# Altium PCB proj_pankov_control_board.PcbDoc (part 1 of 2)
Units mm, origin at the board's own origin, x right, y up, seen from the top; angles counter-clockwise.
Board outline 150 x 100 mm, 2 copper layers (Top Layer, Bottom Layer), stack 1.536 mm thick; 103 components, 103 nets, 425 pads, 60 vias.
Unrouted connection lines stored in the file: 170.
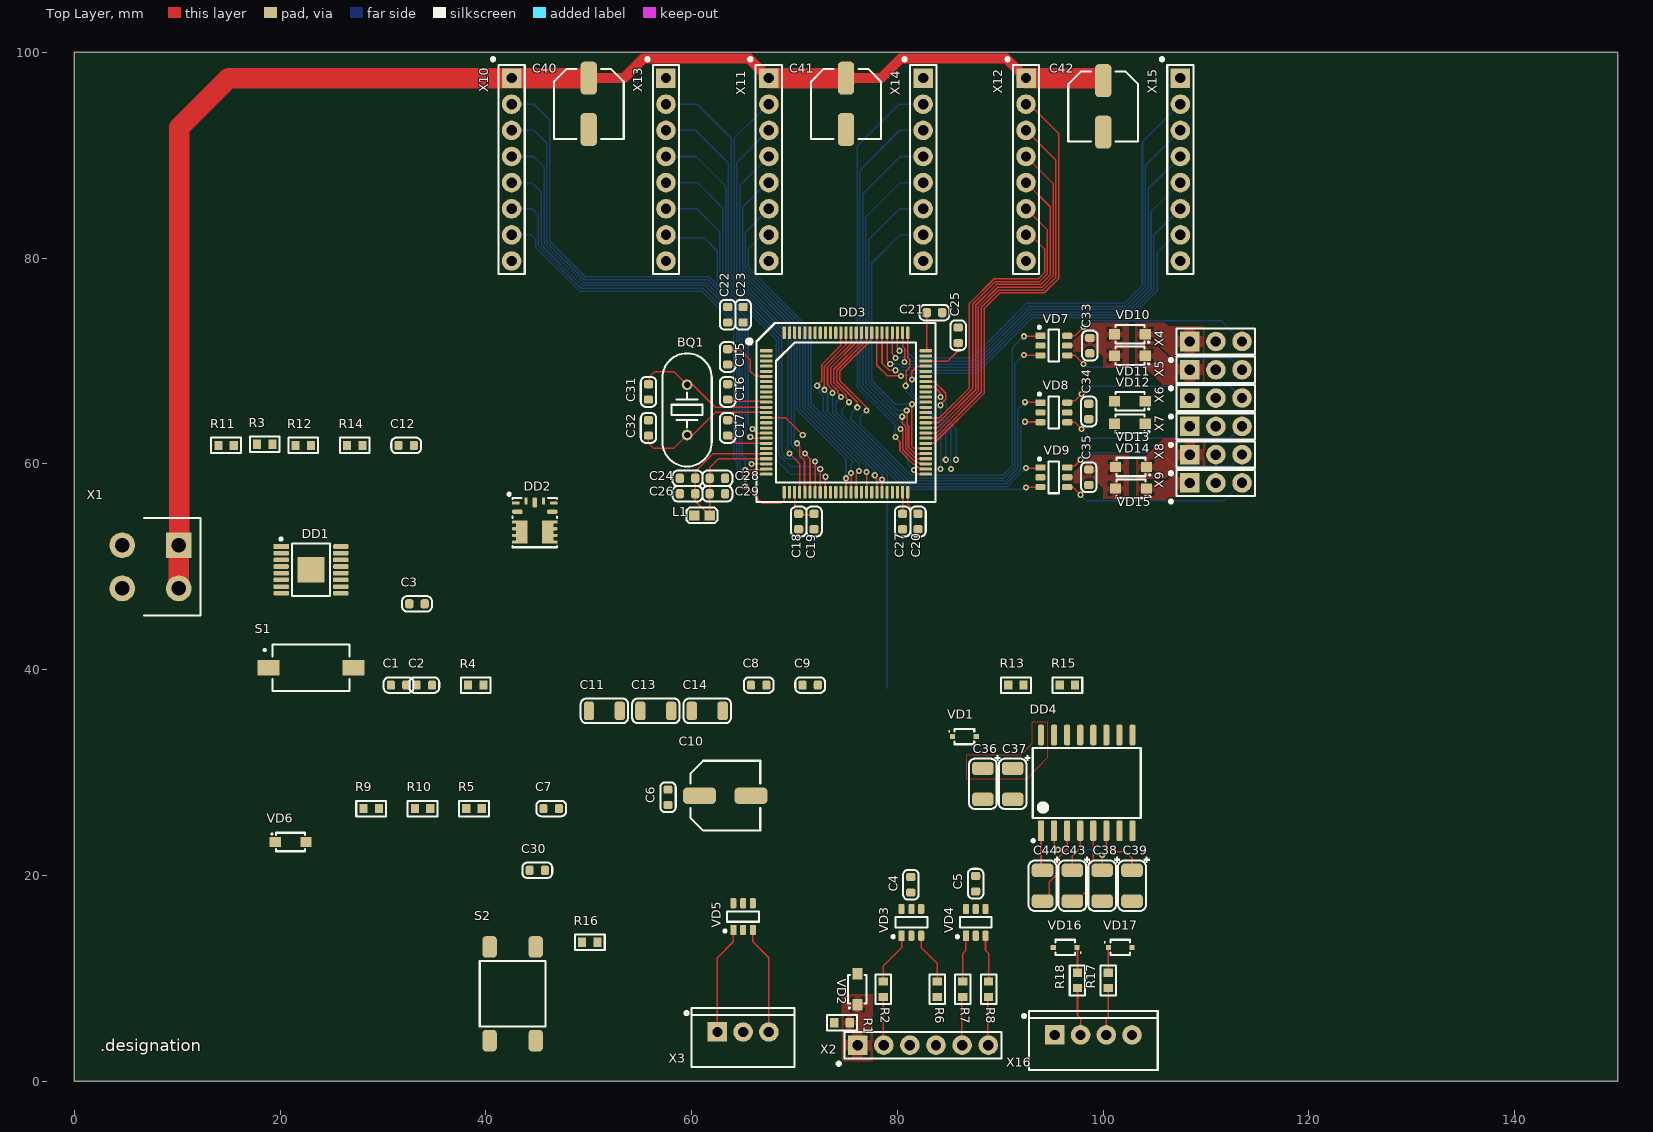
[diagram p0: Top Layer view]
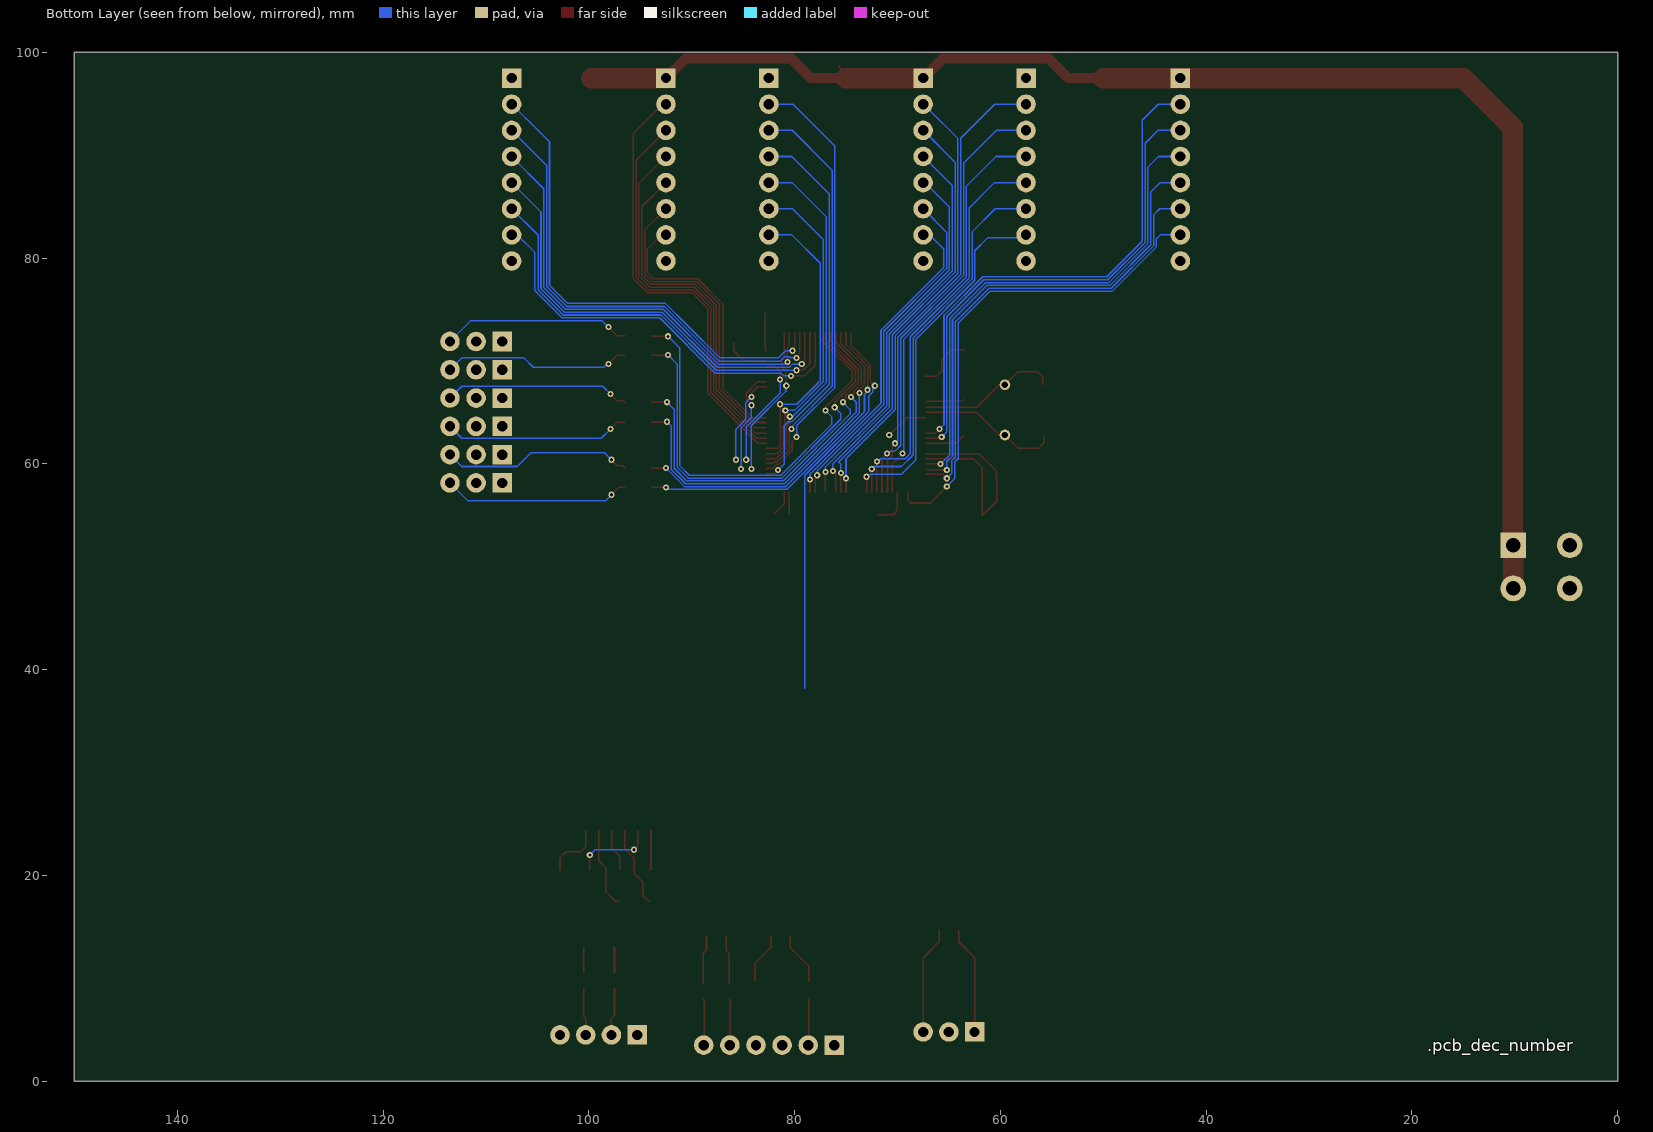
[diagram p1: Bottom Layer view, seen from below]

## Layer stack, top to bottom
Top Solder: solder mask 0.0102, Solder Resist, Dk 3.5
Top Layer: signal copper 0.018
Core 1: core 1.5, FR4, Dk 4.6
Bottom Layer: signal copper 0.018
Bottom Solder: solder mask 0.0102, Solder Resist, Dk 3.5

## Board outline
0,0 150,0 150,100 0,100

## Design rules (kind name [scope] priority, off if disabled: settings)
AcuteAngle min_acute_angle [OnCopper] p1: minimum=3.50000000000000E+0001 checktracksonly=FALSE // Минимальный угол между примитивами топологии
BoardOutlineClearance board_outline_clearance_std [NOT (OnLayer('Bottom Overlay') OR OnLayer('Top Overlay'))] p1: gap=0.25 ignorepadtopadclearanceinfootprint=FALSE except(0: Arc-SplitContinuation Track-SplitContinuation SMDPad-SplitContinuation THPad-SplitContinuation Via-SplitContinuation Fill-SplitContinuation Poly-SplitContinuation Region-SplitContinuation Text-SplitContinuation) // Отступ элементов топологии от края фрезеруемой печатной платы
Clearance clearance_outer_18um_std [OnTopLayer OR OnBottomLayer] p1: gap=0.125 ignorepadtopadclearanceinfootprint=TRUE except(0.2: Arc-Fill Arc-Poly Track-Fill Track-Poly SMDPad-SMDPad SMDPad-Fill SMDPad-Poly THPad-Fill THPad-Poly Via-Fill Via-Poly Fill-Fill Fill-Poly Poly-Poly Poly-Region Poly-Text; 0.25: Arc-Hole Track-Hole SMDPad-Hole THPad-Hole Via-Hole Fill-Hole Poly-Hole Region-Hole Text-Hole) // Зазоры на внешних слоях
Clearance clearance_inner_18um_std [NOT (OnTopLayer Or OnBottomLayer)] p2: gap=0.125 ignorepadtopadclearanceinfootprint=FALSE except(0.2: Arc-Fill Arc-Poly Track-Fill Track-Poly SMDPad-SMDPad SMDPad-Fill SMDPad-Poly THPad-Fill THPad-Poly Via-Fill Via-Poly Fill-Fill Fill-Poly Poly-Poly Poly-Region Poly-Text; 0.25: Arc-Hole Track-Hole SMDPad-Hole THPad-Hole Via-Hole Fill-Hole Poly-Hole Region-Hole Text-Hole) // Зазоры на внутренних слоях
ComponentClearance [All] p1: gap=0 collisioncheckmode=3 verticalgap=0 showdistances=FALSE
DiffPairsRouting diff_pairs_routing [All] p1: maxlimit=0.127 minlimit=0.127 mostfreqgap=0.127 toplayer_minwidth=0.143 toplayer_maxwidth=0.143 toplayer_prefwidth=0.143 bottomlayer_minwidth=0.143 bottomlayer_maxwidth=0.143 bottomlayer_prefwidth=0.143 impedanceprofiledriven=TRUE impedanceprofileid={FD46899E-B5A2-4EF5-A302-5D2DB6A51F35} maxuncoupledlength=12.7 // Правила трассировки дифференциальных пар
HoleSize min_hole_size_std [IsPad] p1: absolutevalues=TRUE maxlimit=5.9 minlimit=0.6 maxpercent=80.000 minpercent=20.000 // Диаметр межслойного переходного отверстия
HoleSize min_hole_size_via_std [IsVia] p2: absolutevalues=TRUE maxlimit=5.9 minlimit=0.3 maxpercent=80.000 minpercent=20.000 // Минимальный диаметр монтажного отверстия
HoleToHoleClearance hole_to_hole_clearance_std [All] p1: gap=0.2 allowstackedmicrovias=FALSE // Минимальное расстояние между краями двух отверстий
MinimumAnnularRing min_via_ar_std [All] p1: minimumring=0.15 // Поясок площадки переходного отверстия (Annular ring VIA)
MinimumAnnularRing min_pad_ar_std [All] p2: minimumring=0.2 // Поясок монтажной контактной площадки (Annular ring PAD)
MinimumSolderMaskSliver min_solder_mask_bridge_std [All] p1: minsoldermaskwidth=0.15 // Мнимальная ширина масочного мостика
PlaneClearance plane_clearance_18um_std [All] p1: clearance=0.2 // Отступ полигона (для слоя plane) от элементов топологии
PlaneConnect [All] p1: planeconnectstyle=Relief reliefexpansion=0.5 reliefentries=4 reliefconductorwidth=0.2 reliefairgap=0.2
PolygonConnect poly_connect_to_pad<=0.3 [(AsMM(PadXSize_AllLayers)<=0.301) or (AsMM(PadYSize_AllLayers)<=0.301)] p1: thpad.connectstyle=Relief thpad.reliefconductorwidth=0.2 thpad.reliefentries=4 thpad.polygonreliefangle="90 Angle" thpad.airgapwidth=0.2 smdpad.connectstyle=Relief smdpad.reliefconductorwidth=0.2 smdpad.reliefentries=4 smdpad.polygonreliefangle="90 Angle" smdpad.airgapwidth=0.2 via.connectstyle=Direct via.reliefconductorwidth=0.254 via.reliefentries=4 via.polygonreliefangle="90 Angle" via.airgapwidth=0.254 // Правила подключения полигонов для падов от 0,3мм и меньше
PolygonConnect poly_connect_to_pad<=0.4 [(AsMM(PadXSize_AllLayers)<=0.401) or (AsMM(PadYSize_AllLayers)<=0.401)] p2: thpad.connectstyle=Relief thpad.reliefconductorwidth=0.26 thpad.reliefentries=4 thpad.polygonreliefangle="90 Angle" thpad.airgapwidth=0.2 smdpad.connectstyle=Relief smdpad.reliefconductorwidth=0.26 smdpad.reliefentries=4 smdpad.polygonreliefangle="90 Angle" smdpad.airgapwidth=0.2 via.connectstyle=Direct via.reliefconductorwidth=0.254 via.reliefentries=4 via.polygonreliefangle="90 Angle" via.airgapwidth=0.254 // Правила подключения полигонов для падов от 0,4 и меньше
PolygonConnect poly_connect_to_pad<=0.6 [(AsMM(PadXSize_AllLayers)<=0.601) or (AsMM(PadYSize_AllLayers)<=0.601)] p3: thpad.connectstyle=Relief thpad.reliefconductorwidth=0.33 thpad.reliefentries=4 thpad.polygonreliefangle="90 Angle" thpad.airgapwidth=0.2 smdpad.connectstyle=Relief smdpad.reliefconductorwidth=0.33 smdpad.reliefentries=4 smdpad.polygonreliefangle="90 Angle" smdpad.airgapwidth=0.2 via.connectstyle=Direct via.reliefconductorwidth=0.254 via.reliefentries=4 via.polygonreliefangle="90 Angle" via.airgapwidth=0.254 // Правила подключения полигонов для падов от 0,6мм и меньше
PolygonConnect poly_connect_to_pad<=0.7 [(AsMM(PadXSize_AllLayers)<=0.701) or (AsMM(PadYSize_AllLayers)<=0.701)] p4: thpad.connectstyle=Relief thpad.reliefconductorwidth=0.46 thpad.reliefentries=4 thpad.polygonreliefangle="90 Angle" thpad.airgapwidth=0.2 smdpad.connectstyle=Relief smdpad.reliefconductorwidth=0.46 smdpad.reliefentries=4 smdpad.polygonreliefangle="90 Angle" smdpad.airgapwidth=0.2 via.connectstyle=Direct via.reliefconductorwidth=0.254 via.reliefentries=4 via.polygonreliefangle="90 Angle" via.airgapwidth=0.254 // Правила подключения полигонов для падов от 0,7мм и меньше
PolygonConnect poly_connect_to_pad<=0.8 [(AsMM(PadXSize_AllLayers)<=0.8)or(AsMM(PadYSize_AllLayers)<=0.8)] p5: thpad.connectstyle=Relief thpad.reliefconductorwidth=0.53 thpad.reliefentries=4 thpad.polygonreliefangle="90 Angle" thpad.airgapwidth=0.3 smdpad.connectstyle=Relief smdpad.reliefconductorwidth=0.53 smdpad.reliefentries=4 smdpad.polygonreliefangle="90 Angle" smdpad.airgapwidth=0.2 via.connectstyle=Direct via.reliefconductorwidth=0.254 via.reliefentries=4 via.polygonreliefangle="90 Angle" via.airgapwidth=0.254 // Правила подключения полигонов для падов от 0,8мм и меньше
PolygonConnect poly_connect_to_pad<=1 [(AsMM(PadXSize_AllLayers)<=1.01)or(AsMM(PadYSize_AllLayers)<=1.01)] p6: thpad.connectstyle=Relief thpad.reliefconductorwidth=0.6 thpad.reliefentries=4 thpad.polygonreliefangle="90 Angle" thpad.airgapwidth=0.3 smdpad.connectstyle=Relief smdpad.reliefconductorwidth=0.6 smdpad.reliefentries=4 smdpad.polygonreliefangle="90 Angle" smdpad.airgapwidth=0.2 via.connectstyle=Direct via.reliefconductorwidth=0.254 via.reliefentries=4 via.polygonreliefangle="90 Angle" via.airgapwidth=0.254 // Правила подключения полигонов для падов от 1мм и меньше
PolygonConnect poly_connect_to_pad<=1.3 [(AsMM(PadXSize_AllLayers)<=1.31)or(AsMM(PadYSize_AllLayers)<=1.31)] p7: thpad.connectstyle=Relief thpad.reliefconductorwidth=0.66 thpad.reliefentries=4 thpad.polygonreliefangle="90 Angle" thpad.airgapwidth=0.3 smdpad.connectstyle=Relief smdpad.reliefconductorwidth=0.86 smdpad.reliefentries=4 smdpad.polygonreliefangle="90 Angle" smdpad.airgapwidth=0.2 via.connectstyle=Direct via.reliefconductorwidth=0.254 via.reliefentries=4 via.polygonreliefangle="90 Angle" via.airgapwidth=0.254 // Правила подключения полигонов для падов от 1,3мм и меньше
PolygonConnect poly_connect_to_pad<=1.6 [(AsMM(PadXSize_AllLayers)<=1.61)or(AsMM(PadYSize_AllLayers)<=1.61)] p8: thpad.connectstyle=Relief thpad.reliefconductorwidth=0.8 thpad.reliefentries=4 thpad.polygonreliefangle="90 Angle" thpad.airgapwidth=0.3 smdpad.connectstyle=Relief smdpad.reliefconductorwidth=1 smdpad.reliefentries=4 smdpad.polygonreliefangle="90 Angle" smdpad.airgapwidth=0.2 via.connectstyle=Direct via.reliefconductorwidth=0.254 via.reliefentries=4 via.polygonreliefangle="90 Angle" via.airgapwidth=0.254 // Правила подключения полигонов для падов от 1,6мм и меньше
PolygonConnect poly_connect_to_pad<=1.8 [(AsMM(PadXSize_AllLayers)<=1.8)or(AsMM(PadYSize_AllLayers)<=1.8)] p9: thpad.connectstyle=Relief thpad.reliefconductorwidth=1 thpad.reliefentries=4 thpad.polygonreliefangle="90 Angle" thpad.airgapwidth=0.3 smdpad.connectstyle=Relief smdpad.reliefconductorwidth=1.2 smdpad.reliefentries=4 smdpad.polygonreliefangle="90 Angle" smdpad.airgapwidth=0.2 via.connectstyle=Direct via.reliefconductorwidth=0.254 via.reliefentries=4 via.polygonreliefangle="90 Angle" via.airgapwidth=0.254 // Правила подключения полигонов для падов от 1,8мм и меньше
PolygonConnect poly_connect_to_pad<=2 [(AsMM(PadXSize_AllLayers)<=2.01)or(AsMM(PadYSize_AllLayers)<=2.01)] p10: thpad.connectstyle=Relief thpad.reliefconductorwidth=1.1 thpad.reliefentries=4 thpad.polygonreliefangle="90 Angle" thpad.airgapwidth=0.3 smdpad.connectstyle=Relief smdpad.reliefconductorwidth=1.4 smdpad.reliefentries=4 smdpad.polygonreliefangle="90 Angle" smdpad.airgapwidth=0.2 via.connectstyle=Direct via.reliefconductorwidth=0.254 via.reliefentries=4 via.polygonreliefangle="90 Angle" via.airgapwidth=0.254 // Правила подключения полигонов для падов от 2мм и меньше
PolygonConnect poly_connect_to_pad<=2.3 [(AsMM(PadXSize_AllLayers)<=2.31)or(AsMM(PadYSize_AllLayers)<=2.31)] p11: thpad.connectstyle=Relief thpad.reliefconductorwidth=1.2 thpad.reliefentries=4 thpad.polygonreliefangle="90 Angle" thpad.airgapwidth=0.3 smdpad.connectstyle=Relief smdpad.reliefconductorwidth=1.4 smdpad.reliefentries=4 smdpad.polygonreliefangle="90 Angle" smdpad.airgapwidth=0.2 via.connectstyle=Direct via.reliefconductorwidth=0.254 via.reliefentries=4 via.polygonreliefangle="90 Angle" via.airgapwidth=0.254 // Правила подключения полигонов для падов от 2,3мм и меньше
PolygonConnect poly_connect_to_pad<=2.5 [(AsMM(PadXSize_AllLayers)<=2.51)or(AsMM(PadYSize_AllLayers)<=2.51)] p12: thpad.connectstyle=Relief thpad.reliefconductorwidth=1.2 thpad.reliefentries=4 thpad.polygonreliefangle="90 Angle" thpad.airgapwidth=0.3 smdpad.connectstyle=Relief smdpad.reliefconductorwidth=1.4 smdpad.reliefentries=4 smdpad.polygonreliefangle="90 Angle" smdpad.airgapwidth=0.2 via.connectstyle=Direct via.reliefconductorwidth=0.254 via.reliefentries=4 via.polygonreliefangle="90 Angle" via.airgapwidth=0.254 // Правила подключения полигонов для падов от 2,5мм и меньше
PolygonConnect poly_connect_to_pad<=2.7 [(AsMM(PadXSize_AllLayers)<=2.71)or(AsMM(PadYSize_AllLayers)<=2.71)] p13: thpad.connectstyle=Relief thpad.reliefconductorwidth=1.4 thpad.reliefentries=4 thpad.polygonreliefangle="90 Angle" thpad.airgapwidth=0.3 smdpad.connectstyle=Relief smdpad.reliefconductorwidth=1.6 smdpad.reliefentries=4 smdpad.polygonreliefangle="90 Angle" smdpad.airgapwidth=0.2 via.connectstyle=Direct via.reliefconductorwidth=0.254 via.reliefentries=4 via.polygonreliefangle="90 Angle" via.airgapwidth=0.254 // Правила подключения полигонов для падов от 2,7мм и меньше
PolygonConnect poly_connect_to_pad<=3 [(AsMM(PadXSize_AllLayers)<=3.01)or(AsMM(PadYSize_AllLayers)<=3.01)] p14: thpad.connectstyle=Relief thpad.reliefconductorwidth=1.6 thpad.reliefentries=4 thpad.polygonreliefangle="90 Angle" thpad.airgapwidth=0.3 smdpad.connectstyle=Relief smdpad.reliefconductorwidth=1.8 smdpad.reliefentries=4 smdpad.polygonreliefangle="90 Angle" smdpad.airgapwidth=0.2 via.connectstyle=Direct via.reliefconductorwidth=0.254 via.reliefentries=4 via.polygonreliefangle="90 Angle" via.airgapwidth=0.254 // Правила подключения полигонов для падов от 3мм и меньше
PolygonConnect poly_connect_to_pad<=7 [(AsMM(PadXSize_AllLayers)<7.01)or(AsMM(PadYSize_AllLayers)<=7.01)] p15: thpad.connectstyle=Relief thpad.reliefconductorwidth=2 thpad.reliefentries=4 thpad.polygonreliefangle="90 Angle" thpad.airgapwidth=0.4 smdpad.connectstyle=Relief smdpad.reliefconductorwidth=2 smdpad.reliefentries=4 smdpad.polygonreliefangle="90 Angle" smdpad.airgapwidth=0.3 via.connectstyle=Direct via.reliefconductorwidth=0.254 via.reliefentries=4 via.polygonreliefangle="90 Angle" via.airgapwidth=0.254 // Правила подключения полигонов для падов от 7мм и меньше
PolygonConnect poly_connect_to_pad [All] p16: thpad.connectstyle=Relief thpad.reliefconductorwidth=0.25 thpad.reliefentries=4 thpad.polygonreliefangle="90 Angle" thpad.airgapwidth=0.2 smdpad.connectstyle=Relief smdpad.reliefconductorwidth=0.25 smdpad.reliefentries=4 smdpad.polygonreliefangle="90 Angle" smdpad.airgapwidth=0.2 via.connectstyle=Direct via.reliefconductorwidth=0.25 via.reliefentries=4 via.polygonreliefangle="90 Angle" via.airgapwidth=0.2 // Правила подключения полигонов общие
RoutingCorners [All] p1 off: cornerstyle=45-Degree minsetback=2.5 maxsetback=2.5
RoutingVias [All] p1: holewidth=0.3 width=0.6 viastyle="Through Hole" minholewidth=0.3 minwidth=0.6 maxholewidth=5.9 maxwidth=6.4
SilkToSilkClearance silk_to_silk_clearance_std [All] p1 off: silktosilkclearance=0.15 // Отступ текста шелкографии от других примитивов шелкографии
SilkToSolderMaskClearance silk_to_solder_mask_clearance_std [IsPad] p1 off: minsilkscreentomaskgap=0.15 clearancetoexposedcopper=FALSE // Минимальное расстояние между элементами шелкографии и вскрытой медью
SolderMaskExpansion solder_mask_expansion_std [All] p1: expansion=0.05 // Припуск паяльной масски
UnRoutedNet [All] p1: checkbadconnections=TRUE
Width width_18um_std [All] p1: maxlimit=10 minlimit=0.125 preferedwidth=0.15 checkconnectedcopper=TRUE // Ширина проводников (общая)
19 further rules are at their usual default settings.

## Components (designator, comment, footprint, x,y, rotation, side; value= is the part's Value field where it differs from the comment)
BQ1 "ECS-120-20-4X-DU" HC-49/US 59.55,65.25 r90 top
C1 "0,1 мк" C0603 31.515,38.5 r0 top
C2 "1 мк" C0603 34.015,38.5 r0 top
C3 "2,2 мк" C0603 33.3,46.4 r0 top
C4 "0,1 мк" C0603 81.3,19.1 r90 top
C5 "0,1 мк" C0603 87.6,19.2 r90 top
C6 "0,1 мк" C0603 57.7,27.6 r90 top
C7 "0,1 мк" C0603 46.35,26.5 r0 top
C8 "0,1 мк" C0603 66.515,38.5 r0 top
C9 "1 мк" C0603 71.515,38.5 r0 top
C10 "100 мк" CAPAE-660X660X800 63.265,27.75 r0 top
C11 "10 мк" C1206 51.515,36 r0 top
C12 "100" C0603 32.25,61.8 r0 top
C13 "47 мк" C1206 56.515,36 r0 top
C14 "47 мк" C1206 61.515,36 r0 top
C15 "1 мк" C0603 63.5,70.4 r270 top
C16 "0,1 мк" C0603 63.5,67 r90 top
C17 "0,1 мк" C0603 63.5,63.5 r90 top
C18 "0,1 мк" C0603 70.4,54.4 r270 top
C19 "0,1 мк" C0603 71.9,54.4 r270 top
C20 "0,1 мк" C0603 82,54.4 r270 top
C21 "0,1 мк" C0603 83.6,74.7 r0 top
C22 "0,1 мк" C0603 63.5,74.5 r90 top
C23 "0,1 мк" C0603 65,74.5 r90 top
C24 "1 мк" C0603 59.6,58.6 r180 top
C25 "2,2 мк" C0603 85.9,72.5 r90 top
C26 "0,01 мк" C0603 59.6,57.1 r180 top
C27 "2,2 мк" C0603 80.5,54.4 r270 top
C28 "1 мк" C0603 62.5,58.6 r0 top
C29 "0,01 мк" C0603 62.5,57.1 r0 top
C30 "0,1 мк" C0603 45,20.5 r0 top
C31 "20" C0603 55.8,67 r90 top
C32 "20" C0603 55.8,63.5 r270 top
C33 "0,1 мк" C0603 98.7,71.5 r270 top
C34 "0,1 мк" C0603 98.6,65.1 r270 top
C35 "0,1 мк" C0603 98.6,58.7 r270 top
C36 "1 мк" C3216-18 88.3,28.9 r270 top
C37 "0,1 мк" C3216-18 91.2,28.9 r270 top
C38 "1 мк" C3216-18 99.9,19 r270 top
C39 "1 мк" C3216-18 102.8,19 r270 top
C40 "100 мк" CAPAE-660X660X800 50,95 r270 top
C41 "100 мк" CAPAE-660X660X800 75,95 r270 top
C42 "100 мк" CAPAE-660X660X800 100,94.75 r270 top
C43 "1 мк" C3216-18 97,19 r270 top
C44 "1 мк" C3216-18 94.1,19 r270 top
DD1 "TPS26400PWPR" HTSSOP-16-P65-500X440X120-L63X25-T246X266 23,49.7 r0 top
DD2 "TPSM84209RKHT" QFN-FCMOD-9-P65-450X400X210 44.75,54.3 r0 top
DD3 "STM32F407VGT6" LQFP-100-P50-1400X1400X160-L60X22 75,65 r0 top
DD4 "MAX232DW" SOIC-16-P127-1030X750X265-L84X41 98.4,29 r90 top
L1 "BLM18KG221SH1D" BLM-2-0603 61,55 r180 top
R1 "10 к" R0603 74.61,5.69 r0 top
R2 "22" R0603 78.61,8.94 r90 top
R3 "270 к" R0603 18.5,61.9 r0 top
R4 "2,4 к" R0603 39.015,38.5 r0 top
R5 "13 к" R0603 38.85,26.5 r0 top
R6 "22" R0603 83.86,8.94 r90 top
R7 "22" R0603 86.36,8.94 r90 top
R8 "22" R0603 88.86,8.94 r90 top
R9 "24 к" R0603 28.85,26.5 r0 top
R10 "51 к" R0603 33.85,26.5 r0 top
R11 "10 к" R0603 14.75,61.8 r0 top
R12 "10 к" R0603 22.25,61.8 r0 top
R13 "51 к" R0603 91.515,38.5 r0 top
R14 "10 к" R0603 27.25,61.8 r0 top
R15 "2,2 к" R0603 96.515,38.5 r0 top
R16 "10 к" R0603 50.1,13.5 r0 top
R17 "22" R0603 100.5,9.8 r90 top
R18 "22" R0603 97.5,9.8 r90 top
S1 "SDA01H1SBD" SDA01H1SBD 23,40.2 r0 top
S2 "FSM4JSMA" FSM4JSMA 42.6,8.5 r90 top
VD1 "SD24C-01FTG" SOD-323-257X130X114 86.515,33.5 r0 top
VD2 "MBR140SFT1G" SOD-123FL-370X165X98 76.11,8.94 r90 top
VD3 "TPD2S017DBVR" SOT-23-6-P95-290X280X145 81.36,15.44 r90 top
VD4 "TPD2S017DBVR" SOT-23-6-P95-290X280X145 87.61,15.44 r90 top
VD5 "TPD2S017DBVR" SOT-23-6-P95-290X280X145 65,16 r90 top
VD6 "MBR140SFT1G" SOD-123FL-370X165X98 21.015,23.25 r0 top
VD7 "TPD2S017DBVR" SOT-23-6-P95-290X280X145 95.2,71.5 r0 top
VD8 "TPD2S017DBVR" SOT-23-6-P95-290X280X145 95.2,65 r0 top
VD9 "TPD2S017DBVR" SOT-23-6-P95-290X280X145 95.2,58.7 r0 top
VD10 "MBR140SFT1G" SOD-123FL-370X165X98 102.6,72.6 r180 top
VD11 "MBR140SFT1G" SOD-123FL-370X165X98 102.6,70.5 r180 top
VD12 "MBR140SFT1G" SOD-123FL-370X165X98 102.6,66.1 r180 top
VD13 "MBR140SFT1G" SOD-123FL-370X165X98 102.6,63.9 r180 top
VD14 "MBR140SFT1G" SOD-123FL-370X165X98 102.7,59.7 r180 top
VD15 "MBR140SFT1G" SOD-123FL-370X165X98 102.7,57.6 r180 top
VD16 "SD12C-01FTG" SOD-323-257X130X114 96.3,13 r180 top
VD17 "SD12C-01FTG" SOD-323-257X130X114 101.65,13 r0 top
X1 "4-1775099-0" 4-1775099-0 7.5,50 r270 top
X2 "DS1021-1x6SF11-B" DS1021-1X6SF11-B 82.48,3.5 r0 top
X3 "DS1069-3MVW6X" DS1069-3MVW6X 65,4.25 r0 top
X4 "DS1021-1x3SF11-B" DS1021-1X3SF11-B 110.95,71.9 r0 top
X5 "DS1021-1x3SF11-B" DS1021-1X3SF11-B 110.95,69.15 r0 top
X6 "DS1021-1x3SF11-B" DS1021-1X3SF11-B 110.95,66.4 r0 top
X7 "DS1021-1x3SF11-B" DS1021-1X3SF11-B 110.95,63.65 r0 top
X8 "DS1021-1x3SF11-B" DS1021-1X3SF11-B 110.95,60.9 r0 top
X9 "DS1021-1x3SF11-B" DS1021-1X3SF11-B 110.95,58.15 r0 top
X10 "DS1023-1x8SF11" DS1023-1X8SF11 42.5,88.61 r270 top
X11 "DS1023-1x8SF11" DS1023-1X8SF11 67.5,88.61 r270 top
X12 "DS1023-1x8SF11" DS1023-1X8SF11 92.5,88.61 r270 top
X13 "DS1023-1x8SF11" DS1023-1X8SF11 57.5,88.61 r270 top
X14 "DS1023-1x8SF11" DS1023-1X8SF11 82.5,88.61 r270 top
X15 "DS1023-1x8SF11" DS1023-1X8SF11 107.5,88.61 r270 top
X16 "DS1069-4MVW6X" DS1069-4MVW6X 99.05,3.962 r0 top

## Footprints (in the part's own frame and the unit in brackets; to place one, negate y for a bottom-side part, rotate by r counter-clockwise, add the part's x,y. Pads: shape width x height; smd on the part's side, far side on the other; paste and mask are expansions set on the pad)
4-1775099-0 [mm] "ATX Power 4 Pins Mount Header, V/A Type"
  rect 2.5x2.5 hole 1.4: 1(-2.1,2.65)
  round 2.5 hole 1.4: 2(2.1,2.65) 3(-2.1,-2.85) 4(2.1,-2.85)
  silkscreen extent -4.75,-0.75 4.75,4.75, body extent -5.1,-6.1 4.75,4.8, height 12.8
BLM-2-0603 [mm] "Chip Inductor, 2-Leads, Body 1,60x0,80mm, IPC Medium Density"
  rect 1.02x0.98 smd: 1(-0.74,0) 2(0.74,0)
  silkscreen extent -1.5,-0.75 1.5,0.75, body extent -0.8,-0.37 0.8,0.38, height 0.8
C0603 [mm] "Chip Capacitor, 2-Leads, Body 1,60x0,80mm, IPC Medium Density"
  rrect50% 0.8x0.9 smd: 1(-0.75,0) 2(0.75,0)
  silkscreen extent -1.45,-0.75 1.45,0.75, body extent -0.8,-0.4 0.8,0.4, height 0.8
C1206 [mm] "Chip Capacitor, 2-Leads, Body 3,20x1,60mm, IPC Medium Density"
  rrect50% 1x1.8 smd: 1(-1.5,0) 2(1.5,0)
  silkscreen extent -2.3,-1.2 2.3,1.2, body extent -1.6,-0.8 1.6,0.8, height 0.78
C3216-18 [mm] "Chip Tantalum Capacitor, 2-Leads, Body 3,20x1,60mm, IPC Medium Density"
  rrect50% 1.3x2.1 smd: 1(-1.5,0) 2(1.5,0)
  Top Layer lines w0.05: 2.45,-0.75 2.425,-0.75
  silkscreen extent -2.8,-1.35 2.45,1.7, body extent -1.7,-0.95 1.7,0.95, height 1.83
CAPAE-660X660X800 [mm] "Aluminum Electrolytic Capacitor, Body 6,60x6,60x8,00mm, IPC Low Density"
  rrect50% 3.2x1.6 smd: 1(-2.5,0) 2(2.5,0)
  silkscreen extent -3.4,-3.4 3.4,3.4, body extent -3.65,-3.3 3.65,3.3, height 7.7
DS1021-1X3SF11-B [mm] "PLS 3 Pins 2,54mm Plug Header V/T Type"
  rect 1.9x1.9 hole 1: 1(-2.54,0)
  round 1.9 hole 1: 2(0,0) 3(2.545,0.005)
  silkscreen extent -4.37,-1.8 3.82,1.28, body extent -3.81,-1.27 3.81,1.27, height 8.59
DS1021-1X6SF11-B [mm] "PLS 6 Pins 2,54mm Plug Header V/T Type"
  rect 1.9x1.9 hole 1: 1(-6.35,0)
  round 1.9 hole 1: 2(-3.81,0) 3(-1.27,0)
  round 1.9 hole 1 mask+0.102: 4(1.27,0) 5(3.81,0) 6(6.35,0)
  silkscreen extent -8.18,-1.8 7.62,1.27, body extent -7.62,-1.27 7.62,1.27, height 8.54
DS1023-1X8SF11 [mm] "PBS 8 Pins 2,54mm Socket Header V/T Blanking Type"
  rect 1.9x1.9 hole 1: 1(-8.89,0)
  round 1.9 hole 1: 2(-6.35,0) 3(-3.81,0)
  round 1.9 hole 1 mask+0.102: 4(-1.27,0) 5(1.27,0) 6(3.81,0) 7(6.35,0) 8(8.89,0)
  silkscreen extent -10.72,-1.8 10.17,1.28, body extent -10.16,-1.27 10.16,1.27, height 8.5
DS1069-3MVW6X [mm] "CWF 3 Pins Plug Header, Pitch 2,5mm, V/T Type"
  rect 1.9x1.9 hole 1: 1(-2.499,0.537)
  round 1.9 hole 1: 2(0.001,0.537) 3(2.501,0.537)
  silkscreen extent -5.5,-2.87 5,2.87, body extent -5,-2.87 5,2.87, height 7
DS1069-4MVW6X [mm] "CWF 4 Pins Plug Header, Pitch 2,5mm, V/T Type"
  rect 1.9x1.9 hole 1: 1(-3.75,0.538)
  round 1.9 hole 1: 2(-1.25,0.538) 3(1.25,0.538) 4(3.75,0.538)
  silkscreen extent -6.75,-2.87 6.25,2.88, body extent -6.25,-2.87 6.25,2.88, height 7
FSM4JSMA [mm]
  rrect50% 2.1x1.4 smd: 1(-4.55,2.24) 1(4.55,2.24) 2(-4.55,-2.24) 2(4.55,-2.24)
  silkscreen extent -3.2,-3.2 3.2,3.2, body extent -5,-3 5,3, height 5.13
HC-49/US [mm] "HC-49/US Quartz Crystall"
  round 1.03 hole 0.63: 1(-2.44,0) 2(2.44,0)
  silkscreen extent -5.5,-2.4 5.5,2.4, body extent -5.4,-2.3 5.4,2.3, height 3.53
HTSSOP-16-P65-500X440X120-L63X25-T246X266 [mm] "HTSSOP, 16-Leads, Body 5,00x4,40mm, Pitch 0,65mm, Thermal Pad 2,46x2,66mm, IPC Medium Density"
  rect 2.66x2.46 smd: 0(0,0)
  rect 1.5x0.45 smd: 1(-2.9,2.275)
  rrect50% 1.5x0.45 smd: 2(-2.9,1.625) 3(-2.9,0.975) 4(-2.9,0.325) 5(-2.9,-0.325) 6(-2.9,-0.975) 7(-2.9,-1.625) 8(-2.9,-2.275) 9(2.9,-2.275) 10(2.9,-1.625) 11(2.9,-0.975) 12(2.9,-0.325) 13(2.9,0.325) 14(2.9,0.975) 15(2.9,1.625) 16(2.9,2.275)
  silkscreen extent -3.02,-2.55 1.85,3.12, body extent -3.2,-2.5 3.2,2.5, height 1.2
LQFP-100-P50-1400X1400X160-L60X22 [mm] "LQFP, 100-Leads, Body 14,00x14,00mm, Pitch 0,50mm, IPC Medium Density"
  rect 1.2x0.3 smd: 1(-7.75,6)
  rrect50% 1.2x0.3 smd: 2(-7.75,5.5) 3(-7.75,5) 4(-7.75,4.5) 5(-7.75,4) 6(-7.75,3.5) 7(-7.75,3) 8(-7.75,2.5) 9(-7.75,2) 10(-7.75,1.5) 11(-7.75,1) 12(-7.75,0.5) 13(-7.75,0) 14(-7.75,-0.5) 15(-7.75,-1) 16(-7.75,-1.5) 17(-7.75,-2) 18(-7.75,-2.5) 19(-7.75,-3) 20(-7.75,-3.5) 21(-7.75,-4) 22(-7.75,-4.5) 23(-7.75,-5) 24(-7.75,-5.5) 25(-7.75,-6) 51(7.75,-6) 52(7.75,-5.5) 53(7.75,-5) 54(7.75,-4.5) 55(7.75,-4) 56(7.75,-3.5) 57(7.75,-3) 58(7.75,-2.5) 59(7.75,-2) 60(7.75,-1.5) 61(7.75,-1) 62(7.75,-0.5) 63(7.75,0) 64(7.75,0.5) 65(7.75,1) 66(7.75,1.5) 67(7.75,2) 68(7.75,2.5) 69(7.75,3) 70(7.75,3.5) 71(7.75,4) 72(7.75,4.5) 73(7.75,5) 74(7.75,5.5) 75(7.75,6)
  rrect50% 0.3x1.2 smd: 26(-6,-7.75) 27(-5.5,-7.75) 28(-5,-7.75) 29(-4.5,-7.75) 30(-4,-7.75) 31(-3.5,-7.75) 32(-3,-7.75) 33(-2.5,-7.75) 34(-2,-7.75) 35(-1.5,-7.75) 36(-1,-7.75) 37(-0.5,-7.75) 38(0,-7.75) 39(0.5,-7.75) 40(1,-7.75) 41(1.5,-7.75) 42(2,-7.75) 43(2.5,-7.75) 44(3,-7.75) 45(3.5,-7.75) 46(4,-7.75) 47(4.5,-7.75) 48(5,-7.75) 49(5.5,-7.75) 50(6,-7.75) 76(6,7.75) 77(5.5,7.75) 78(5,7.75) 79(4.5,7.75) 80(4,7.75) 81(3.5,7.75) 82(3,7.75) 83(2.5,7.75) 84(2,7.75) 85(1.5,7.75) 86(1,7.75) 87(0.5,7.75) 88(0,7.75) 89(-0.5,7.75) 90(-1,7.75) 91(-1.5,7.75) 92(-2,7.75) 93(-2.5,7.75) 94(-3,7.75) 95(-3.5,7.75) 96(-4,7.75) 97(-4.5,7.75) 98(-5,7.75) 99(-5.5,7.75) 100(-6,7.75)
  silkscreen extent -9.6,-8.7 8.7,8.7, body extent -8,-8 8,8, height 1.6
QFN-FCMOD-9-P65-450X400X210 [mm] "QFN-FCMOD, 9-Leads, Body 4,50x4,00mm, Pitch 0,65mm, IPC Medium Density"
  rect 0.7x0.3 smd: 1(-1.85,1.9)
  rrect50% 1x0.4 smd: 2(-1.7,1.05) 5(1.7,1.05)
  rrect50% 0.5x0.3 smd: 3(-1.95,-1.9) 3(-1.95,-1.25) 3(-1.95,-0.6) 3(-1.95,0.05) 4(1.95,-1.9) 4(1.95,-1.25) 4(1.95,-0.6) 4(1.95,0.05)
  rrect10% 1.125x2.25 smd: 3(-1.26,-0.925) 4(1.26,-0.925)
  rrect50% 0.7x0.3 smd: 6(1.85,1.9)
  rrect50% 0.3x0.7 smd: 7(0.85,2.1) 9(-0.85,2.1)
  rrect50% 0.4x1 smd: 8(0,1.95)
  silkscreen extent -2.62,-2.4 2.15,2.87, body extent -2,-2.25 2,2.25, height 2.1
R0603 [mm] "Chip Resistor, 2-Leads, Body 1,60x0,80mm, IPC Medium Density"
  rect 0.8x0.9 smd: 1(-0.75,0) 2(0.75,0)
  silkscreen extent -1.45,-0.75 1.45,0.75, body extent -0.77,-0.43 0.78,0.43, height 0.43
SDA01H1SBD [mm]
  rect 2.15x1.5 smd: 1(-4.125,0) 2(4.125,0)
  silkscreen extent -4.6,-2.26 3.74,2.26, body extent -4.65,-2.26 4.65,2.26, height 5.44
SOD-123FL-370X165X98 [mm] "SODFL, 2-Leads, Body 3,70x1,65mm, IPC Medium Density"
  rect 1.1x1 smd: 1(-1.5,0) 2(1.5,0)
  silkscreen extent -1.87,-0.9 1.4,0.9, body extent -1.8,-0.82 1.8,0.83, height 0.95
SOD-323-257X130X114 [mm] "SOD, 2-Leads, Body 2,57x1,30mm, IPC Medium Density"
  rect 0.5x0.5 smd: 1(-1.15,0) 2(1.15,0)
  silkscreen extent -1.55,-0.75 0.95,0.75, body extent -1.3,-0.67 1.3,0.68, height 1.1
SOIC-16-P127-1030X750X265-L84X41 [mm] "SOIC, 16-Leads, Body 10,30x7,50mm, Pitch 1,27mm, IPC Medium Density"
  rect 2x0.6 smd: 1(-4.65,4.445)
  rrect50% 2x0.6 smd: 2(-4.65,3.175) 3(-4.65,1.905) 4(-4.65,0.635) 5(-4.65,-0.635) 6(-4.65,-1.905) 7(-4.65,-3.175) 8(-4.65,-4.445) 9(4.65,-4.445) 10(4.65,-3.175) 11(4.65,-1.905) 12(4.65,-0.635) 13(4.65,0.635) 14(4.65,1.905) 15(4.65,3.175) 16(4.65,4.445)
  silkscreen extent -5.75,-5.25 3.4,5.32, body extent -5.24,-5.17 5.24,5.18, height 2.65
SOT-23-6-P95-290X280X145 [mm] "SOT-23, 6-Leads, Body 2,90x2,80mm, Pitch 0,95mm, IPC Medium Density"
  rect 1x0.6 smd: 1(-1.3,0.95)
  rrect50% 1x0.6 smd: 2(-1.3,0) 3(-1.3,-0.95) 4(1.3,-0.95) 5(1.3,0) 6(1.3,0.95)
  silkscreen extent -1.52,-1.55 0.5,1.9, body extent -1.4,-1.45 1.4,1.45, height 1.45

## Part data
BQ1: library part bq0005, "=Описание", HelpURL=https://ecsxtal.com/hc-49usx, ID=bq0005, Корпус=HC-49/US, Наименование=ECS-120-20-4X-DU, Описание="Кварцевый резонатор 12 МГц нагрузочные конденсаторы 20 пФ", Производитель="ECS, Inc. International", Фамилия=Паньков, Частотa="12 МГц", Частота="12 МГц"
C1 C8: library part c0065, "=Описание", HelpURL=https://www.yageo.com/upload/media/product/productsearch/datasheet/mlcc/UPY-GPHC_X7R_6.3V-to-50V_20.pdf, ID=c0065, Корпус=0603, Наименование=CC0603KRX7R9BB104, Напряжение="50 В", Номинал="0,1 мк", Номинальное напряжение="50 В", Описание="Конденсатор керамический чип 0603 100 нФ 50 В ±10 %", Отклонение="±10 %", Производитель="YAGEO Corp.", Рабочие температуры="от –55 °С до +125 °С", Температурный коэффициент емкости=X7R, Фамилия=Паньков
C2 C9: library part c0095, "=Описание", HelpURL=https://www.yageo.com/upload/media/product/productsearch/datasheet/mlcc/UPY-GPHC_X7R_6.3V-to-50V_20.pdf, ID=c0095, Корпус=0603, Наименование=CC0603KRX7R9BB105, Напряжение="50 В", Номинал="1 мк", Номинальное напряжение="50 В", Описание="Конденсатор керамический чип 0603 1 мкФ 50 В ±10 %", Отклонение="±10 %", Производитель="YAGEO Corp.", Рабочие температуры="от –55 °С до +125 °С", Температурный коэффициент емкости=X7R, Фамилия=Паньков
C3: library part c0100, "=Описание", HelpURL=https://www.yageo.com/upload/media/product/productsearch/datasheet/mlcc/UPY-GPHC_X7R_6.3V-to-50V_20.pdf, ID=c0100, Корпус=0603, Наименование=CC0603KRX7R6BB225, Напряжение="10 В", Номинал="2,2 мк", Номинальное напряжение="10 В", Описание="Конденсатор керамический чип 0603 2,2 мкФ 10 В ±10 %", Отклонение="±10 %", Производитель="YAGEO Corp.", Рабочие температуры="от –55 °С до +125 °С", Температурный коэффициент емкости=X7R, Фамилия=Чернов
C4 C5 C6 C33 C34 C35: library part c0077, "=Описание", HelpURL=https://www.yageo.com/upload/media/product/productsearch/datasheet/mlcc/UPY-GPHC_X7R_6.3V-to-50V_20.pdf, ID=c0077, Корпус=0603, Наименование=CC0603KRX7R6BB104, Напряжение="10 В", Номинал="0,1 мк", Номинальное напряжение="10 В", Описание="Конденсатор керамический чип 0603 100 нФ 10 В ±10 %", Отклонение="±10 %", Производитель="YAGEO Corp.", Рабочие температуры="от –55 °С до +125 °С", Температурный коэффициент емкости=X7R, Фамилия=Паньков
C7 C30: library part c0057, "=Описание", HelpURL=https://www.yageo.com/upload/media/product/productsearch/datasheet/mlcc/UPY-GPHC_X7R_6.3V-to-50V_20.pdf, ID=c0057, Корпус=0603, Наименование=CC0603KRX7R6BB104, Напряжение="10 В", Номинал="0,1 мк", Номинальное напряжение="10 В", Описание="Конденсатор керамический чип 0603 100 нФ 10 В ±10 %", Отклонение="±10 %", Производитель="YAGEO Corp.", Рабочие температуры="от –55 °С до +125 °С", Температурный коэффициент емкости=X7R, Фамилия=Паньков
C10 C40 C41 C42: library part c0168, "=Описание", HelpURL=https://industrial.panasonic.com/ww/products/capacitors/aluminum-capacitors/aluminum-cap-smd/models/EEEFTH101XAP, ID=c0168, Корпус="CAPAE (6,6 x 6,6 x 8,0)", Наименование=EEEFTH101XAP, Напряжение="50 В", Номинал="100 мк", Номинальное напряжение="50 В", Описание="Конденсатор электролитический алюминиевый 100 мкФ 50 В ±20 %", Отклонение="±20 %", Производитель="Panasonic Corporation", Рабочие температуры="от –55 °С до +105 °С", Среднеквадратичный размах пульсации тока="0,35 А", Фамилия=Паньков, Эквивалентное последовательное сопротивление="0,34 Ом"
C11: library part c0148, "=Описание", HelpURL=https://www.yageo.com/upload/media/product/productsearch/datasheet/mlcc/UPY-GPHC_X5R_4V-to-50V_26.pdf, ID=c0148, Корпус=1206, Наименование=CC1206KKX5R9BB106, Напряжение="50 В", Номинал="10 мк", Номинальное напряжение="50 В", Описание="Конденсатор керамический чип 1206 10 мкФ 50 В ±10 %", Отклонение="±10 %", Производитель="YAGEO Corp.", Рабочие температуры="от –55 °С до +85 °С", Температурный коэффициент емкости=X5R, Фамилия=Самарин
C12: library part c0023, "=Описание", HelpURL=https://www.yageo.com/upload/media/product/productsearch/datasheet/mlcc/UPY-GP_NP0_16V-to-50V_18.pdf, ID=c0023, Корпус=0603, Наименование=CC0603FRNPO9BN101, Напряжение="50 В", Номинал=100, Номинальное напряжение="50 В", Описание="Конденсатор керамический чип 0603 100 пФ 50 В ±1 %", Отклонение="±1 %", Производитель="YAGEO Corp.", Рабочие температуры="от –55 °С до +125 °С", Температурный коэффициент емкости=C0G, Фамилия=Паньков
C13 C14: library part c0166, "=Описание", HelpURL=https://www.yageo.com/upload/media/product/productsearch/datasheet/mlcc/UPY-GPHC_X5R_4V-to-50V_26.pdf, ID=c0166, Корпус=1206, Наименование=CC1206MKX5R7BB476, Напряжение="16 В", Номинал="47 мк", Номинальное напряжение="16 В", Описание="Конденсатор керамический чип 1206 47 мкФ 16 В ±20 %", Отклонение="±20 %", Производитель="YAGEO Corp.", Рабочие температуры="от –55 °С до +85 °С", Температурный коэффициент емкости=X5R, Фамилия=Паньков
C15 C24 C28: library part c0086, "=Описание", HelpURL=https://www.yageo.com/upload/media/product/productsearch/datasheet/mlcc/UPY-GPHC_X7R_6.3V-to-50V_20.pdf, ID=c0086, Корпус=0603, Наименование=CC0603KRX7R6BB105, Напряжение="10 В", Номинал="1 мк", Номинальное напряжение="10 В", Описание="Конденсатор керамический чип 0603 1 мкФ 10 В ±10 %", Отклонение="±10 %", Производитель="YAGEO Corp.", Рабочие температуры="от –55 °С до +125 °С", Температурный коэффициент емкости=X7R, Фамилия=Паньков
C16 C17 C18 C19 C20 C21 C22 C23: library part c0054, "=Описание", HelpURL=https://www.yageo.com/upload/media/product/productsearch/datasheet/mlcc/UPY-GPHC_X7R_6.3V-to-50V_20.pdf, ID=c0054, Корпус=0603, Наименование=CC0603KRX7R6BB104, Напряжение="10 В", Номинал="0,1 мк", Номинальное напряжение="10 В", Описание="Конденсатор керамический чип 0603 100 нФ 10 В ±10 %", Отклонение="±10 %", Производитель="YAGEO Corp.", Рабочие температуры="от –55 °С до +125 °С", Температурный коэффициент емкости=X7R, Фамилия=Паньков
C25 C27: library part c0097, "=Описание", HelpURL=https://www.yageo.com/upload/media/product/productsearch/datasheet/mlcc/UPY-GPHC_X7R_6.3V-to-50V_20.pdf, ID=c0097, Корпус=0603, Наименование=CC0603KRX7R6BB225, Напряжение="10 В", Номинал="2,2 мк", Номинальное напряжение="10 В", Описание="Конденсатор керамический чип 0603 2,2 мкФ 10 В ±10 %", Отклонение="±10 %", Производитель="YAGEO Corp.", Рабочие температуры="от –55 °С до +125 °С", Температурный коэффициент емкости=X7R, Фамилия=Чернов
C26 C29: library part c0033, "=Описание", HelpURL=https://www.yageo.com/upload/media/product/productsearch/datasheet/mlcc/UPY-GPHC_X7R_6.3V-to-50V_20.pdf, ID=c0033, Корпус=0603, Наименование=CC0603KRX7R6BB103, Напряжение="10 В", Номинал="0,01 мк", Номинальное напряжение="10 В", Описание="Конденсатор керамический чип 0603 10 нФ 10 В ±10 %", Отклонение="±10 %", Производитель="YAGEO Corp.", Рабочие температуры="от –55 °С до +125 °С", Температурный коэффициент емкости=X7R, Фамилия=Паньков
C31 C32: library part c0019, "=Описание", HelpURL=https://www.yageo.com/upload/media/product/productsearch/datasheet/mlcc/UPY-GP_NP0_16V-to-50V_18.pdf, ID=c0019, Корпус=0603, Наименование=CC0603FRNPO9BN200, Напряжение="50 В", Номинал=20, Номинальное напряжение="50 В", Описание="Конденсатор керамический чип 0603 20 пФ 50 В ±1 %", Отклонение="±1 %", Производитель="YAGEO Corp.", Рабочие температуры="от –55 °С до +125 °С", Температурный коэффициент емкости=C0G, Фамилия=Паньков
C36 C38 C39 C43 C44: library part c0014, "=Описание", HelpURL=https://www.vishay.com/capacitors/list/product-40002/, ID=c0014, Корпус=3216-18, Наименование=293D105X9025A2TE3, Напряжение="25 В", Номинал="1 мк", Номинальное напряжение="25 В", Описание="Конденсатор танталовый чип 3216-18 1 мкФ 25 В ±10 %", Отклонение="±10 %", Производитель="Vishay Intertechnology, Inc.", Рабочие температуры="от –55 °С до +125 °С", Среднеквадратичный размах пульсации тока="0,10 А", Фамилия=Ларионов, Эквивалентное последовательное сопротивление="7,6 Ом"
C37: library part c0001, "=Описание", HelpURL=https://www.vishay.com/capacitors/list/product-40002/, ID=c0001, Корпус=3216-18, Наименование=293D104X9050A2TE3, Напряжение="50 В", Номинал="0,1 мк", Номинальное напряжение="50 В", Описание="Конденсатор танталовый чип 3216-18 100 нФ 50 В ±10 %", Отклонение="±10 %", Производитель="Vishay Intertechnology, Inc.", Рабочие температуры="от –55 °С до +125 °С", Среднеквадратичный размах пульсации тока="0,06 А", Фамилия=Ларионов, Эквивалентное последовательное сопротивление="19,0 Ом"
DD1: library part dd0005, "=Описание", HelpURL=https://www.ti.com/product/TPS2640, ID=dd0005, Корпус=HTSSOP-16, Максимальное напряжение="55 В", Наименование=TPS26400PWPR, Напряжение="от 4,2 В до 42 В", Описание="Защитная микросхема eFuse 42 В и 2 А", Производитель="Texas Instruments Inc.", Рабочие температуры="от –40 °С до +125 °С", Ток="от 0,1 А до 2,23 А", Фамилия=Паньков
DD2: library part dd0020, "=Описание", HelpURL=https://www.ti.com/product/TPSM84209, ID=dd0020, Входное напряжение="от 4,5 В до 28 В", Выходное напряжение="от 1,2 В до 6 В", Коммутируемый ток="до 2,5 А", Корпус=QFN-FCMOD-9, Наименование=TPSM84209RKHT, Описание="Понижающий преобразователь напряжения 28 В и 2,5 А", Производитель="Texas Instruments Inc.", Рабочие температуры="от –40 °С до +85 °С", Фамилия=Паньков, Частота переключения="от 578 кГц до 923 кГц"
DD3: library part dd0001, "=Описание", HelpURL=https://www.st.com/en/microcontrollers-microprocessors/stm32f407vg.html, ID=dd0001, Корпус=LQFP-100, Максимальная тактовая частота="168 МГц", Наименование=STM32F407VGT6, Описание="ARM Cortex-M4 32-разрядный микроконтроллер 168 МГц 1 Мбайт FLASH-памяти", Поддерживаемые интерфейсы="CAN, I2C, SDIO, I2S/SPI, UART/USART, USB", Производитель=STMicroelectronics, Рабочее напряжение="от 1,8 В до 3,6 В", Рабочие температуры="от –40 °С до +85 °С", Фамилия=Паньков
DD4: library part dd0014, "=Описание", HelpURL=https://www.ti.com/product/MAX232, ID=dd0014, Корпус=SOIC-16, Наименование=MAX232DW, Описание="Приемопередатчик RS-232", Производитель="Texas Instruments Inc.", Рабочие температуры="от 0 до +70 °C", Фамилия=Паньков
L1: library part l0001, "=Описание", HelpURL=https://www.murata.com/en-global/products/productdetail?partno=BLM18KG221SH1%23, ID=l0001, Корпус=0603, Наименование=BLM18KG221SH1D, Описание="Ферритовая бусина 220 Ом ±25 %", Отклонение, 100 МГц="±25 %", Производитель="Murata Manufacturing Co., Ltd.", Рабочие температуры="от –55 °С до +125 °С", Сопротивление, 100 МГц="220 Ом", Сопротивление при постоянном токе="0,05 Ом", Фамилия=Ларионов
R1 R11 R12 R14 R16: library part r0105, "=Описание", HelpURL=https://www.yageo.com/upload/media/product/productsearch/datasheet/rchip/PYu-RC_Group_51_RoHS_L_11.pdf, ID=r0105, Корпус=0603, Наименование=RC0603FR-0710KL, Номинал="10 к", Номинальное напряжение="75 В", Номинальный ток="1 А", Описание="Резистор чип 0603 10 кОм ±1 % 0,1 Вт", Отклонение="±1 %", Примечание="Ряд E24", Производитель="YAGEO Corp.", Рабочие температуры="от –55 °С до +155 °С", Фамилия=Самарин
R2 R6 R7 R8: library part r0034, "=Описание", HelpURL=https://www.yageo.com/upload/media/product/productsearch/datasheet/rchip/PYu-RC_Group_51_RoHS_L_11.pdf, ID=r0034, Корпус=0603, Наименование=RC0603FR-0722RL, Номинал=22, Номинальное напряжение="75 В", Номинальный ток="1 А", Описание="Резистор чип 0603 22 Ом ±1 % 0,1 Вт", Отклонение="±1 %", Примечание="Ряд E24", Производитель="YAGEO Corp.", Рабочие температуры="от –55 °С до +155 °С", Фамилия=Ларионов
R3: library part r0157, "=Описание", HelpURL=https://www.yageo.com/upload/media/product/productsearch/datasheet/rchip/PYu-RC_Group_51_RoHS_L_11.pdf, ID=r0157, Корпус=0603, Наименование=RC0603FR-07270KL, Номинал="270 к", Номинальное напряжение="75 В", Номинальный ток="1 А", Описание="Резистор чип 0603 270 кОм ±1 % 0,1 Вт", Отклонение="±1 %", Примечание="Ряд E24", Производитель="YAGEO Corp.", Рабочие температуры="от –55 °С до +155 °С", Фамилия=Паньков
R4: library part r0086, "=Описание", HelpURL=https://www.yageo.com/upload/media/product/productsearch/datasheet/rchip/PYu-RC_Group_51_RoHS_L_11.pdf, ID=r0086, Корпус=0603, Наименование=RC0603FR-072K4L, Номинал="2,4 к", Номинальное напряжение="75 В", Номинальный ток="1 А", Описание="Резистор чип 0603 2,4 кОм ±1 % 0,1 Вт", Отклонение="±1 %", Примечание="Ряд E24", Производитель="YAGEO Corp.", Рабочие температуры="от –55 °С до +155 °С", Фамилия=Паньков
R5: library part r0110, "=Описание", HelpURL=https://www.yageo.com/upload/media/product/productsearch/datasheet/rchip/PYu-RC_Group_51_RoHS_L_11.pdf, ID=r0110, Корпус=0603, Наименование=RC0603FR-0713KL, Номинал="13 к", Номинальное напряжение="75 В", Номинальный ток="1 А", Описание="Резистор чип 0603 13 кОм ±1 % 0,1 Вт", Отклонение="±1 %", Примечание="Ряд E24", Производитель="YAGEO Corp.", Рабочие температуры="от –55 °С до +155 °С", Фамилия=Жернаков
R9: library part r0118, "=Описание", HelpURL=https://www.yageo.com/upload/media/product/productsearch/datasheet/rchip/PYu-RC_Group_51_RoHS_L_11.pdf, ID=r0118, Корпус=0603, Наименование=RC0603FR-0724KL, Номинал="24 к", Номинальное напряжение="75 В", Номинальный ток="1 А", Описание="Резистор чип 0603 24 кОм ±1 % 0,1 Вт", Отклонение="±1 %", Примечание="Ряд E24", Производитель="YAGEO Corp.", Рабочие температуры="от –55 °С до +155 °С", Фамилия=Паньков
R10 R13: library part r0131, "=Описание", HelpURL=https://www.yageo.com/upload/media/product/productsearch/datasheet/rchip/PYu-RC_Group_51_RoHS_L_11.pdf, ID=r0131, Корпус=0603, Наименование=RC0603FR-0751KL, Номинал="51 к", Номинальное напряжение="75 В", Номинальный ток="1 А", Описание="Резистор чип 0603 51 кОм ±1 % 0,1 Вт", Отклонение="±1 %", Примечание="Ряд E24", Производитель="YAGEO Corp.", Рабочие температуры="от –55 °С до +155 °С", Фамилия=Паньков
R15: library part r0085, "=Описание", HelpURL=https://www.yageo.com/upload/media/product/productsearch/datasheet/rchip/PYu-RC_Group_51_RoHS_L_11.pdf, ID=r0085, Корпус=0603, Наименование=RC0603FR-072K2L, Номинал="2,2 к", Номинальное напряжение="75 В", Номинальный ток="1 А", Описание="Резистор чип 0603 2,2 кОм ±1 % 0,1 Вт", Отклонение="±1 %", Примечание="Ряд E24", Производитель="YAGEO Corp.", Рабочие температуры="от –55 °С до +155 °С", Фамилия=Паньков
R17 R18: library part r0004, "=Описание", HelpURL=https://www.yageo.com/upload/media/product/productsearch/datasheet/rchip/PYu-RC_Group_51_RoHS_L_11.pdf, ID=r0004, Корпус=0603, Наименование=RC0603FR-0722RL, Номинал=22, Номинальное напряжение="75 В", Номинальный ток="1 А", Описание="Резистор чип 0603 22 Ом ±1 % 0,1 Вт", Отклонение="±1 %", Примечание="Ряд E24", Производитель="YAGEO Corp.", Рабочие температуры="от –55 °С до +155 °С", Фамилия=Ларионов
S1: library part s0005, "=Описание", HelpURL=https://www.ckswitches.com/products/switches/product-details/DIP/SDA/SDA01H1SBD/, ID=s0005, Количество контактов=2, Корпус="4,52 х 9,30 х 5,45", Наименование=SDA01H1SBD, Описание="2-х позиционный движковый переключатель", Производитель=C&K, Промывка=Запрещена, Рабочие температуры="от –40 °С до +85 °С", Сопротивление контакта="50 мОм", Ток нагрузки="100 мА @ 5 В", Фамилия=Паньков
S2: library part s0001, "=Описание", HelpURL=https://www.te.com/usa-en/product-4-1437565-1.html, ID=s0001, Количество контактов=4, Корпус="6,00 x 6,00 x 4,98", Наименование=FSM4JSMA, Описание="Тактовая кнопка поверхностного монтажа", Производитель="TE Connectivity", Промывка=Запрещена, Рабочие температуры="от –35 °С до +85 °С", Сопротивление контакта="100 мОм", Ток нагрузки="50 мА @ 24 В", Фамилия=Паньков
VD1: library part vd0007, "=Описание", HelpURL=https://www.littelfuse.com/products/tvs-diode-arrays/general-purpose-esd-protection/sdc/sd24c_01ftg.aspx, ID=vd0007, Корпус=SOD-323, Наименование=SD24C-01FTG, Описание="Двунаправленная диодная сборка для подавления помех 24 В", Производитель="Littelfuse, Inc.", Фамилия=Игнатова
VD2 VD6 VD10 VD11 VD12 VD13 VD14 VD15: library part vd0002, "=Описание", HelpURL=https://www.onsemi.com/products/discretes-drivers/diodes-rectifiers/schottky-diodes-schottky-rectifiers/mbr140sf, ID=vd0002, Корпус=SOD-123FL, Максимальное обратное напряжение="40 В", Максимальное прямое напряжение="0,88 В", Максимальный прямой ток="1 А", Наименование=MBR140SFT1G, Описание="Диод Шоттки 40 В 1 А", Производитель="ON Semiconductor", Рабочие температуры="от –55 °С до +125 °С", Фамилия=Паньков
VD3 VD4 VD5 VD7 VD8 VD9: library part vd0016, "=Описание", HelpURL=https://www.ti.com/product/TPD2S017, ID=vd0016, Корпус=SOT-23-6, Наименование=TPD2S017DBVR, Описание="Диодная сборка для подавления помех 5 В", Производитель="Texas Instruments Inc.", Фамилия=Паньков
VD16 VD17: library part vd0004, "=Описание", HelpURL=https://www.littelfuse.com/products/tvs-diode-arrays/general-purpose-esd-protection/sdc/sd12c_01ftg.aspx, ID=vd0004, Корпус=SOD-323, Наименование=SD12C-01FTG, Описание="Двунаправленная диодная сборка для подавления помех 12 В", Производитель="Littelfuse, Inc.", Фамилия=Ларионов
X1: library part x0006, "=Описание", Contact_1=+24V, Contact_2=+24V, Contact_3=GND, Contact_4=GND, HelpURL=https://www.te.com/usa-en/product-4-1775099-0.html, ID=x0006, Наименование=4-1775099-0, Описание="ATX Power 4 pin гнездо прямой", Производитель="TE Connectivity", Фамилия=Ларионов
X2: library part x0028, "=Описание", Contact_1=+3,3V, Contact_2=SWCLK, Contact_3=GND, Contact_4=SWDIO, Contact_5=nRST, Contact_6=SWO, HelpURL=http://en.connfly.group/product/xVkr=EusQssAN0gN=Aos=mU+UrVkR9kqEAN0gN9g+WqANB+A, ID=x0028, Наименование=DS1021-1x6SF11-B, Описание="PLS 6 pin 2,54 мм вилка прямой", Производитель="Connfly Electronic Co., Ltd.", Фамилия=Паньков
X3: library part x0043, "=Описание", Contact_1=nINT, Contact_2=GND, Contact_3=nKILL, HelpURL=http://en.connfly.group/product/xVkr=EusQssAN0gN=Aos=mU+UrVkR9kqEAN0gN0MUR+g+NB+A, ID=x0043, Наименование=DS1069-3MVW6X, Описание="CWF 3 pin 2,5 мм вилка прямой", Производитель="Connfly Electronic Co., Ltd.", Фамилия=Паньков
X4 X5 X6 X7 X8 X9: library part x0026, "=Описание", Contact_1=+3,3V, Contact_2=GND, HelpURL=http://en.connfly.group/product/xVkr=EusQssAN0gN=Aos=mU+UrVkR9kqEAN0gN9g+WqANB+A, ID=x0026, Наименование=DS1021-1x3SF11-B, Описание="PLS 3 pin 2,54 мм вилка прямой", Производитель="Connfly Electronic Co., Ltd.", Фамилия=Паньков
  X4: Contact_3=XMIN
  X5: Contact_3=XMAX
  X6: Contact_3=YMIN
  X7: Contact_3=YMAX
  X8: Contact_3=ZMIN
  X9: Contact_3=ZMAX
X10 X11 X12 X13 X14 X15: library part x0036, "=Описание", Contact_8=GND, HelpURL=http://en.connfly.group/product/xVkr=EusQssAN0gN=Aos=mU+UrVkR9kqEAN0gN0AUCUNB+A, ID=x0036, Наименование=DS1023-1x8SF11, Описание="PBS 8 pin 2,54 мм гнездо прямой", Производитель="Connfly Electronic Co., Ltd.", Фамилия=Паньков
  X10 X11 X12: Contact_1=+24V, Contact_2=nSLEEP, Contact_3=RESET, Contact_4=STEP/AIN1, Contact_5=DIR/AIN2, Contact_6=BIN1, Contact_7=BIN2
  X13 X14 X15: Contact_1=+3,3V, Contact_2=SCK, Contact_3=MISO, Contact_4=nCS, Contact_5=MOSI, Contact_6=nFAULT, Contact_7=nSTALL
X16: library part x0045, "=Описание", Contact_1=GND, Contact_2=TX, Contact_3=RX, Contact_4=GND, HelpURL=http://en.connfly.group/product/xVkr=EusQssAN0gN=Aos=mU+UrVkR9kqEAN0gN0MUR+g+NB+A, ID=x0045, Наименование=DS1069-4MVW6X, Описание="CWF 4 pin 2,5 мм вилка прямой", Производитель="Connfly Electronic Co., Ltd.", Фамилия=Паньков

## Via types
v1: diameter 0.6, hole 0.3, Top Layer to Bottom Layer, tented both sides, 60 vias

## Nets (pads, with @x,y where several pads share a name; then routed paths per layer and width w, separated by ;. In a path a pad name is that pad's centre, name@x,y a point inside that pad or via, vN(x,y) a via of type N, cw(c..) or ccw(c..) an arc to the next point about the centre after c; other vN are vias at no path point)
0V: C3.2 DD1.0 DD1.6 DD1.8 R5.1 R9.1 R10.1
+3,3V: C4.1 C5.1 C6.1 C12.1 C13.1 C14.1 C15.1 C16.1 C17.1 C18.1 C19.1 C20.1 C21.1 C22.1 C23.1 C33.1 C34.1 C35.1 C36.1 C37.1 DD2.3 DD3.6 DD3.11 DD3.19 DD3.28 DD3.50 DD3.75 DD3.100 DD4.16 L1.2 R14.2 R16.2 VD2.2 VD3.5 VD4.5 VD5.5 VD7.5 VD8.5 VD9.5 VD10.2 VD11.2 VD12.2 VD13.2 VD14.2 VD15.2 X13.1 X14.1 X15.1 | length 23.7
  Top Layer w0.15: C17.1 63.55,62.75 64.3,62 DD3.19 ; C16.1 63.675,66.075 67.175,66.075 DD3.11 ; C15.1 63.564,71.086 64.714,71.086 65.7,70.1 65.7,69 66.2,68.5 DD3.6 DD3.6@67.175,68.575 ; DD3.28 70,55.668 70.102,55.565 70.102,55.348 70.4,55.05 C19.1@71.9,55.05 ; C18.1@70.5,55.25 C18.1@70.5,55.268 ; DD3.50 81,56.1 81.95,55.15 C20.1 ; DD3.75 82.775,71 82.85,71.075 C21.1
+24V: C1.1 C2.1 C40.1 C41.1 C42.1 DD1.1 DD1.2 R3.2 VD1.2 X1.1 X1.2 X10.1 X11.1 X12.1 | length 142.5
  Top Layer w0.15: X1.1 9.3,52.95 X1.1@10.2,52.95 ; C41.1 75,97.95 C41.1@75.7,98.65 ; C42.1@99.75,97.5 C42.1
  Top Layer w1: C40.1 53.4,97.5 55.3,99.4 63.025,99.4 65.6,99.4 X11.1 ; C41.1 78.4,97.5 80.3,99.4 88.025,99.4 90.6,99.4 X12.1
  Top Layer w2: X1.2 X1.1 ; X1.1@10.2,52.95 10.2,92.7 15,97.5 X10.1 C40.1 ; X11.1 C41.1 ; X12.1 C42.1@99.75,97.5
CONN_LIMSW_XMAX: VD7.4 X5.3 | length 18.3
  Top Layer w0.15: VD7.4 97.25,70.55 v1(98.1,69.7)
  Bottom Layer w0.15: v1(98.1,69.7) 98.222,69.7 98.522,69.4 105.4,69.4 106.3,70.3 112.35,70.3 X5.3
CONN_LIMSW_XMIN: VD7.6 X4.3 | length 18.4
  Top Layer w0.15: VD7.6 97.25,72.45 v1(98.1,73.3)
  Bottom Layer w0.15: v1(98.1,73.3) 98.7,73.9 111.5,73.9 X4.3
CONN_LIMSW_YMAX: VD8.4 X7.3 | length 18.1
  Top Layer w0.15: VD8.4 97.25,64.05 v1(97.9,63.4)
  Bottom Layer w0.15: v1(97.9,63.4) 98.8,62.5 112.34,62.5 X7.3
CONN_LIMSW_YMIN: VD8.6 X6.3 | length 18.1
  Top Layer w0.15: VD8.6 96.675,66.125 97.225,66.125 v1(97.9,66.8)
  Bottom Layer w0.15: v1(97.9,66.8) 98.65,67.55 112.35,67.55 X6.3
CONN_LIMSW_ZMAX: VD9.4 X9.3 | length 18.3
  Top Layer w0.15: VD9.4 97.05,57.75 v1(97.8,57)
  Bottom Layer w0.15: v1(97.8,57) 98.4,56.4 111.74,56.4 X9.3
CONN_LIMSW_ZMIN: VD9.6 X8.3 | length 18.6
  Top Layer w0.15: VD9.6 96.675,59.825 97.225,59.825 v1(97.8,60.4)
  Bottom Layer w0.15: v1(97.8,60.4) 98.5,61.1 105.6,61.1 106.95,59.75 112.34,59.75 X8.3
CONN_nINT: VD5.1 X3.1 | length 10.6
  Top Layer w0.15: X3.1 62.501,12.001 64.05,13.55 VD5.1
CONN_nKILL: VD5.3 X3.3 | length 10.6
  Top Layer w0.15: VD5.3 65.95,13.55 67.501,11.999 X3.3
CONN_nRST: R7.1 X2.5 | length 4.6
  Top Layer w0.15: X2.5@86.23,3.44 86.23,7.81 R7.1@86.36,7.94
CONN_RS232_RXD: DD4.13 R17.2 VD17.1 | length 2.5
  Top Layer w0.15: R17.2 VD17.1
CONN_RS232_TXD: DD4.14 R18.2 VD16.1 | length 2.5
  Top Layer w0.15: R18.2 97.5,12.95 VD16.1@97.55,13
CONN_SWCLK: R2.1 X2.2 | length 4.5
  Top Layer w0.15: X2.2@78.61,3.44 R2.1@78.61,7.94
CONN_SWDIO: R6.1 X2.4
CONN_SWO: R8.1 X2.6 | length 4.5
  Top Layer w0.15: X2.6@88.77,3.44 88.77,7.85 R8.1@88.86,7.94
GND: C1.2 C2.2 C4.2 C5.2 C6.2 C7.2 C8.2 C9.2 C10.2 C11.2 C13.2 C14.2 C15.2 C16.2 C17.2 C18.2 C19.2 C20.2 C21.2 C22.2 C23.2 C24.2 C25.2 C26.2 C27.2 C28.2 C29.2 C30.2 C31.1 C32.1 C33.2 C34.2 C35.2 C36.2 C37.2 C38.2 C39.2 C40.2 C41.2 C42.2 DD1.9 DD2.8 DD3.10 DD3.20 DD3.27 DD3.74 DD3.94 DD3.99 DD4.15 R1.1 R13.1 R15.1 S1.2 S2.2 VD1.1 VD3.2 VD4.2 VD5.2 VD6.2 VD7.2 VD8.2 VD9.2 VD16.2 VD17.2 X1.3 X1.4 X2.3 X3.2 X4.2 X5.2 X6.2 X7.2 X8.2 X9.2 X10.8 X11.8 X12.8 X13.8 X14.8 X15.8 X16.1 X16.4
MCU_DEV1_BIN1: DD3.25 X10.6 | length 46
  Top Layer w0.15: v1(65.2,58.6) 65.6,59 DD3.25
  Bottom Layer w0.15: X10.6 44.5,84.8 45.1,84.2 45.1,81.189 49.214,77.075 61.1,77.075 64.375,73.8 64.375,60.647 64.7,60.322 64.7,59.1 v1(65.2,58.6)
MCU_DEV1_BIN2: DD3.26 X10.7 | length 47.3
  Top Layer w0.15: v1(65.2,57.8) 66.8,56.2 68.7,56.2 69,56.5 DD3.26
  Bottom Layer w0.15: X10.7 44.44,82.26 44.825,81.875 44.825,81.075 49.1,76.8 60.986,76.8 64.1,73.686 64.1,60.5 64.425,60.175 64.425,58.575 v1(65.2,57.8)
MCU_DEV1_DIR/AIN2: DD3.24 X10.5 | length 47.6
  Top Layer w0.15: v1(65.2,59.4) 65.25,59.45 67.2,59.45 DD3.24
  Bottom Layer w0.15: X10.5 44.46,87.34 45.375,86.425 45.375,81.303 49.328,77.35 61.311,77.35 64.65,74.011 64.65,60.761 65.2,60.211 v1(65.2,59.4)
MCU_DEV1_nFAULT: DD3.33 X13.6 | length 37.1
  Top Layer w0.15: DD3.33 v1(72.5,59.5)